# Altium PCB Main_pcb.PcbDoc
Units mil, origin at the board's own origin, x right, y up, seen from the top; angles counter-clockwise.
Board outline 2745 x 3735 mil, 2 copper layers (Top Layer, Bottom Layer); 45 components, 44 nets, 175 pads, 5 vias.
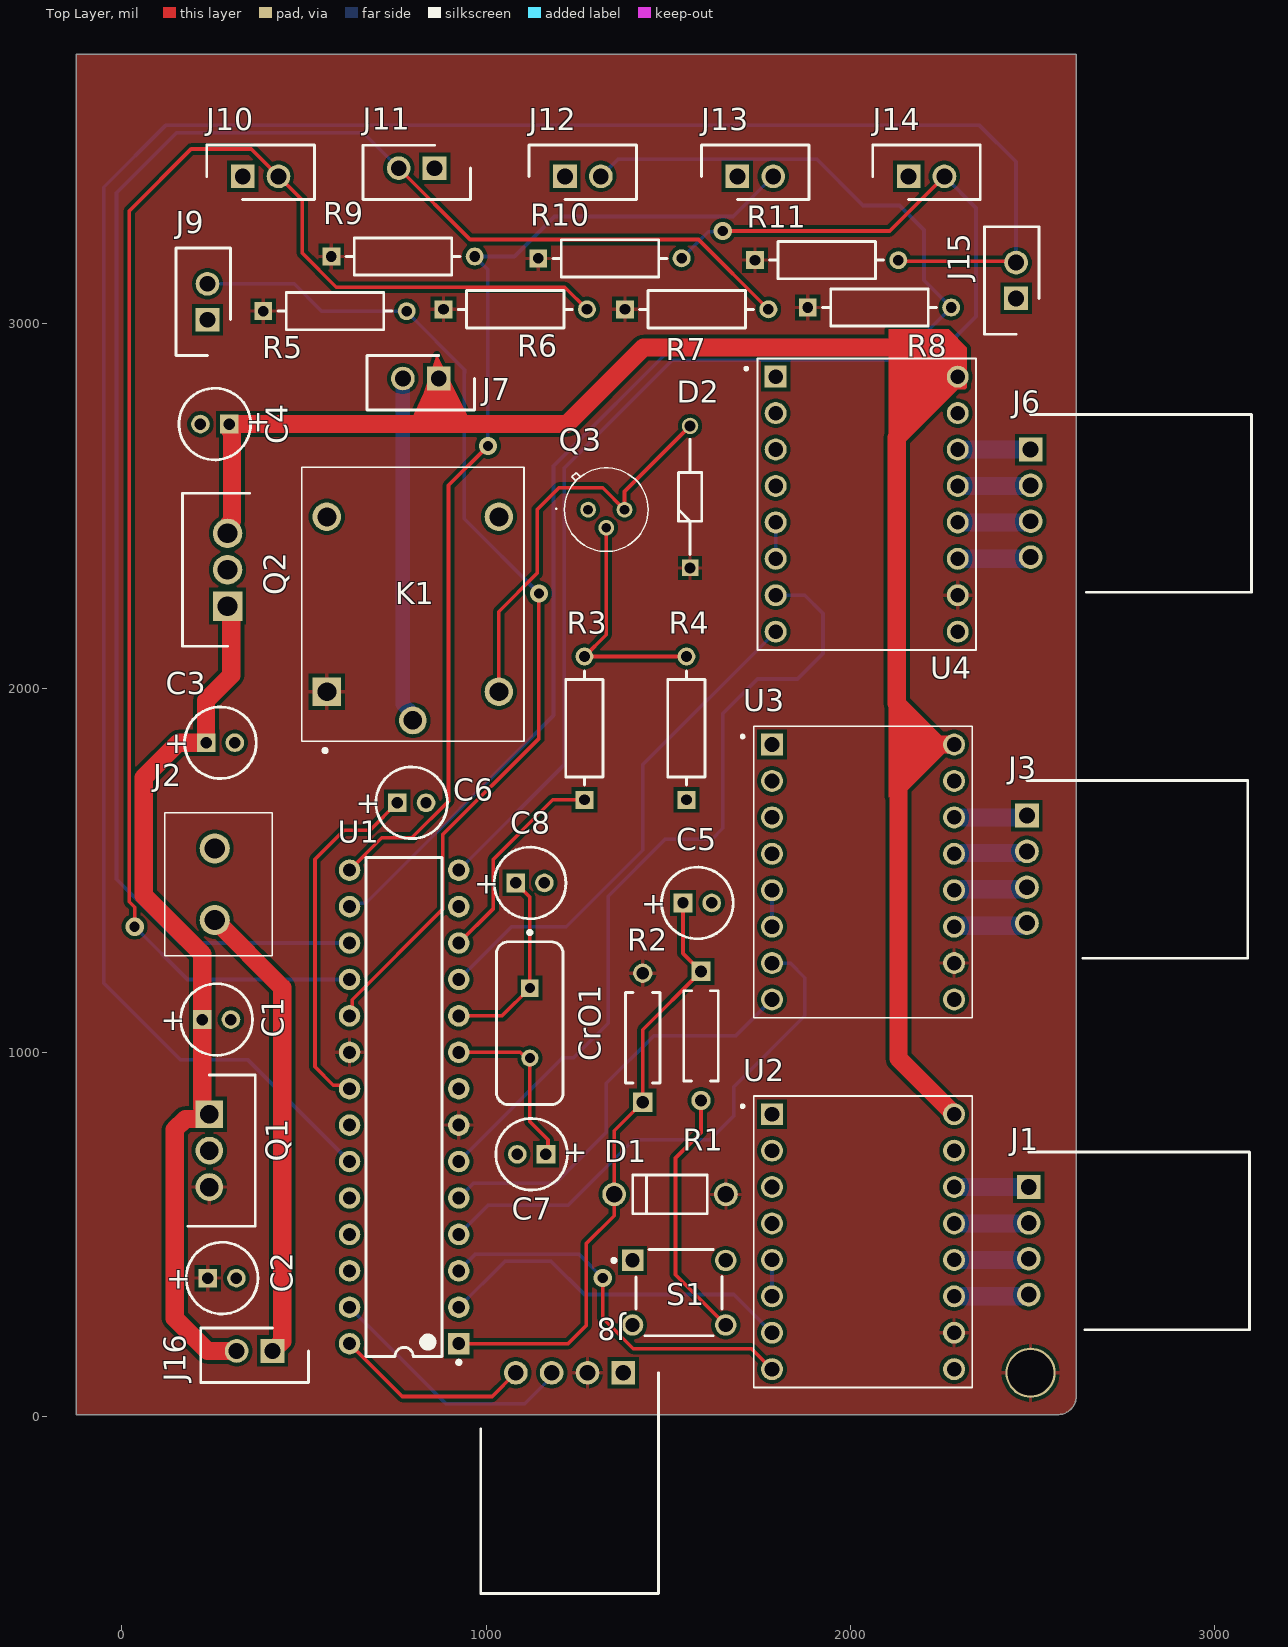
[diagram p0: Top Layer view]
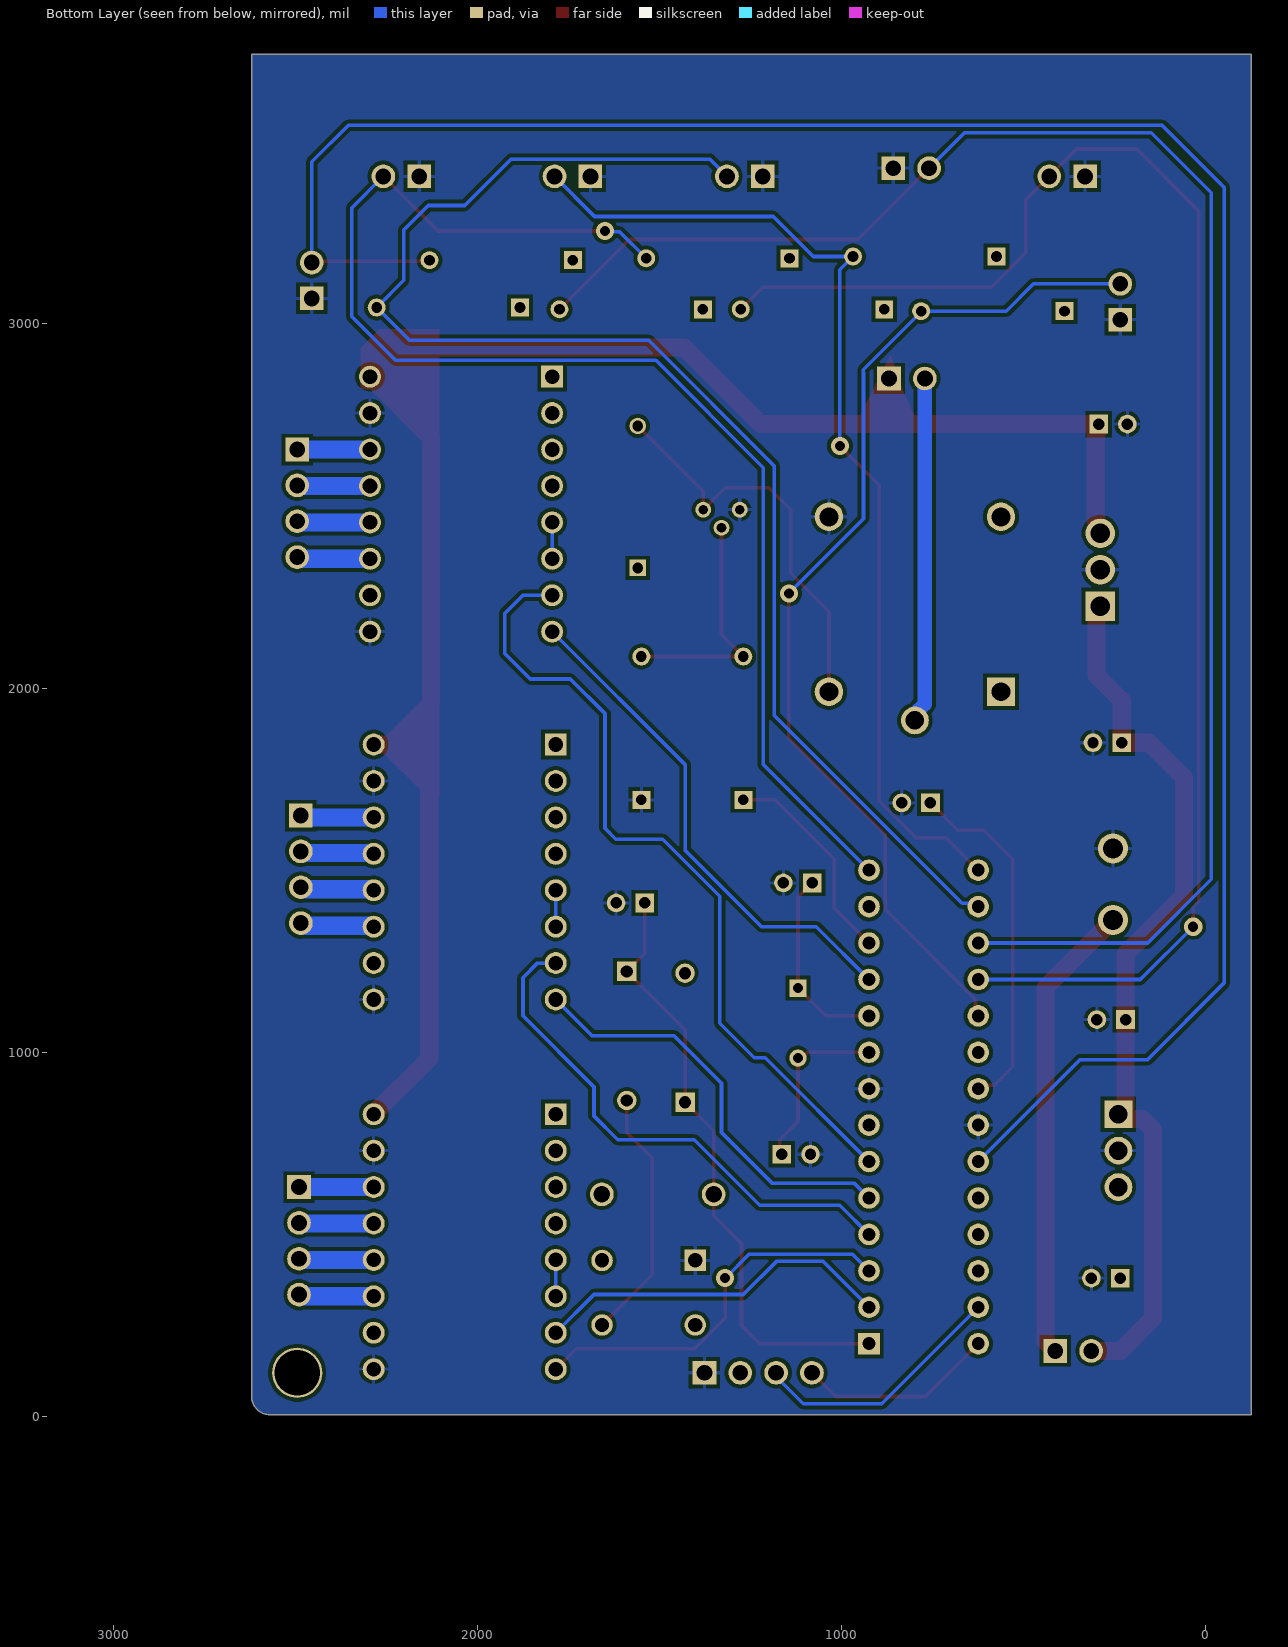
[diagram p1: Bottom Layer view, seen from below]
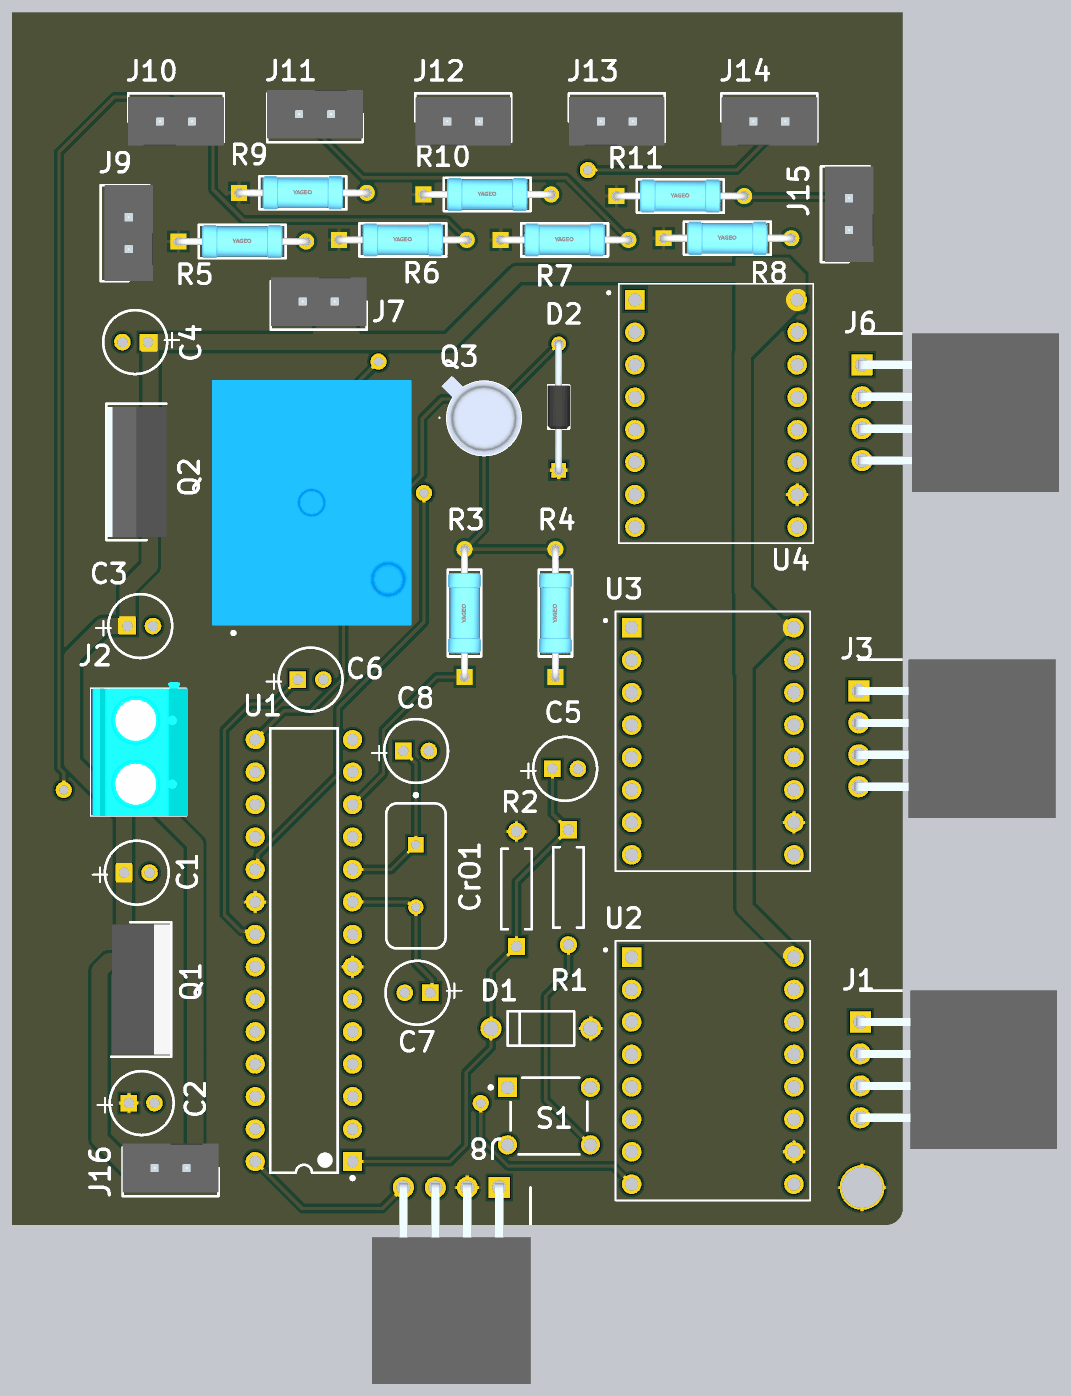
[diagram p2: 3D render of the assembled board from above, using the file's embedded part models]

## Layer stack, top to bottom
Top Solder: solder mask 0.4, Solder Resist, Dk 3.5
Top Layer: signal copper 1.4
Dielectric 1: dielectric 12.6, FR-4, Dk 4.8
Bottom Layer: signal copper 1.4
Bottom Solder: solder mask 0.4, Solder Resist, Dk 3.5

## Board outline
-125,5 -125,3740 2620,3740 2620,55 cw(c2570.01,54.99) 2570,5

## Design rules (kind name [scope] priority, off if disabled: settings)
Clearance [All] p1: gap=10 ignorepadtopadclearanceinfootprint=FALSE except(0: Arc-Hole Track-Hole SMDPad-Hole THPad-Hole Via-Hole Fill-Hole Poly-Hole Region-Hole Text-Hole)
PolygonConnect [All] p1: connectstyle=Relief reliefconductorwidth=10 reliefentries=4 polygonreliefangle="90 Angle" airgapwidth=10
RoutingVias [All] p1: holewidth=28 width=50 viastyle="Through Hole" minholewidth=28 minwidth=50 maxholewidth=28 maxwidth=50
SolderMaskExpansion [All] p1: expansion=4 istentingtop=FALSE
Width [All] p1: maxlimit=60 minlimit=10 preferedwidth=10 minimp=50.000000 maximp=50.000000 favimp=50.000000
30 further rules are at their usual default settings.

## Classes and differential pairs
component class U_Relay: D2 K1 Q3 R3 R4
component class U_microcontroller: C5 C6 C7 C8 CrO1 D1 J9 J10 J11 J12 J13 J14 J15 R1 R2 R5 R6 R7 R8 R9 R10 R11 S1 U1
component class U_A4988_motor_drivers: U2 U3 U4
component class U_Power_circuit: C1 C2 C3 C4 Q1 Q2
component class Main_Schematic: J1 J2 J3 J6 J7 J8 J16

## Components (designator, comment, footprint, x,y, rotation, side; value= is the part's Value field where it differs from the comment)
C1 "ECA1HM100" CAPPR55-200-1100X500X1200 260,1090 r0 top value=10µF
C2 "ECA1HM100" CAPPR55-200-1100X500X1200 275,380 r0 top value=1µF
C3 "ECA1HM100" CAPPR55-200-1100X500X1200 270.63,1850 r0 top value=100µF
C4 "ECA1HM100" CAPPR55-200-1100X500X1200 255,2725 r180 top value=0.1µF
C5 "ECA1HM100" CAPPR55-200-1100X500X1200 1580,1410 r0 top value=10µF
C6 "ECA1HM100" CAPPR55-200-1100X500X1200 795.63,1685 r0 top value=10µF
C7 "ECA1HM100" CAPPR55-200-1100X500X1200 1125,720 r180 top value=22pF
C8 "ECA1HM100" CAPPR55-200-1100X500X1200 1120.63,1465 r0 top value=22pF
CrO1 "FOXSLF/160-20" FOX-FOXSLF160-20 1120,1080 r270 top
D1 "1N4007" FAIR-DO-41-2 1505,610 r180 top
D2 "1N4148TR" DIOAD990W55L340D162 1560,2330 r90 top
J1 "Motor_1" SHDRRA4W64P0X250_1X4_1240X1150X700P 2490,630 r270 top
J2 "KF301-2P" KF3012P 255,1560 r270 top
J3 "Motor_2" SHDRRA4W64P0X250_1X4_1240X1150X700P 2485,1650 r270 top
J6 "Motor_3" SHDRRA4W64P0X250_1X4_1240X1150X700P 2495,2655 r270 top
J7 "coil" SHDR2W64P0X250_1X2_750X380X600P 870,2850 r180 top
J8 "Motor_3" SHDRRA4W64P0X250_1X4_1240X1150X700P 1376.85,120 r180 top
J9 "M1" SHDR2W64P0X250_1X2_750X380X600P 235,3011.57 r90 top
J10 "M2" SHDR2W64P0X250_1X2_750X380X600P 331.57,3405 r0 top
J11 "M3" SHDR2W64P0X250_1X2_750X380X600P 858.43,3427.64 r180 top
J12 "M4" SHDR2W64P0X250_1X2_750X380X600P 1216.57,3405 r0 top
J13 "M5" SHDR2W64P0X250_1X2_750X380X600P 1690,3405 r0 top
J14 "M6" SHDR2W64P0X250_1X2_750X380X600P 2160,3405 r0 top
J15 "M7" SHDR2W64P0X250_1X2_750X380X600P 2455,3070 r90 top
J16 "Input" SHDR2W64P0X250_1X2_750X380X600P 413.43,180 r180 top
K1 "SRD-05VDC-SL-C" RELAY_SRD-05VDC-SL-C 798.78,2230.16 r90 top
Q1 "LM7805CT" TO254P470X1028X1955-3P 240,830 r270 top
Q2 "LM7809CT" TO254P470X1016X2019-3P 290,2225.2 r90 top
Q3 "BC109C" CENTRAL_TO18 1330,2490 r0 top
R1 "MFR-25FBF52-221R" RESA60-630X240 1590,1045 r270 top value=221
R2 "MFR-25FBF52-10K" RESA60-630X240 1430,1040 r90 top value=10k
R3 "1k" FP-MFR-25-MFG#1 1270,1890 r90 top value=1.18kΩ
R4 "10k" FP-MFR-25-MFG#1 1550,1890 r90 top value=1.18kΩ
R5 "1k" FP-MFR-25-MFG#2 585,3035 r0 top value=1.18kΩ
R6 "1k" FP-MFR-25-MFG#2 1080,3040 r0 top value=1.18kΩ
R7 "1k" FP-MFR-25-MFG#2 1578.15,3040 r0 top value=1.18kΩ
R8 "1k" FP-MFR-25-MFG#2 2080,3045 r0 top value=1.18kΩ
R9 "1k" FP-MFR-25-MFG#2 771.85,3185 r0 top value=1.18kΩ
R10 "1k" FP-MFR-25-MFG#2 1340,3180 r0 top value=1.18kΩ
R11 "1k" FP-MFR-25-MFG#2 1935,3175 r0 top value=1.18kΩ
S1 "B3F-1000" OMRON-B3F-1000-4_V 1530,340 r0 top
U1 "ATMEGA328P-PU" ATML-28P3 775,850 r180 top
U2 "A4988_STEPPER_MOTOR_DRIVER_CARRIER" MODULE_A4988_STEPPER_MOTOR_DRIVER_CARRIER 2035,480 r0 top
U3 "A4988_STEPPER_MOTOR_DRIVER_CARRIER" MODULE_A4988_STEPPER_MOTOR_DRIVER_CARRIER 2035,1495 r0 top
U4 "A4988_STEPPER_MOTOR_DRIVER_CARRIER" MODULE_A4988_STEPPER_MOTOR_DRIVER_CARRIER 2045,2505 r0 top

## Footprints (in the part's own frame and the unit in brackets; to place one, negate y for a bottom-side part, rotate by r counter-clockwise, add the part's x,y. Pads: shape width x height; smd on the part's side, far side on the other; paste and mask are expansions set on the pad)
ATML-28P3 [mm] "DIP, 28-Leads, Body 34.8x7.2mm, Pitch 2.54mm"
  rect 1.5x1.5 hole 0.9: 1(-3.81,16.51)
  round 1.5 hole 0.9: 2(-3.81,13.97) 3(-3.81,11.43) 4(-3.81,8.89) 5(-3.81,6.35) 6(-3.81,3.81) 7(-3.81,1.27) 8(-3.81,-1.27) 9(-3.81,-3.81) 10(-3.81,-6.35) 11(-3.81,-8.89) 12(-3.81,-11.43) 13(-3.81,-13.97) 14(-3.81,-16.51) 15(3.81,-16.51) 16(3.81,-13.97) 17(3.81,-11.43) 18(3.81,-8.89) 19(3.81,-6.35) 20(3.81,-3.81) 21(3.81,-1.27) 22(3.81,1.27) 23(3.81,3.81) 24(3.81,6.35) 25(3.81,8.89) 26(3.81,11.43) 27(3.81,13.97) 28(3.81,16.51)
  silkscreen extent -3.94,-17.4 2.65,17.93, body extent -3.95,-17.4 3.95,17.4, height 4.58
CAPPR55-200-1100X500X1200 [mm] "THD, 2-Leads, Dia 5mm, Pin Spacing 2mm"
  rect 1.3x1.3 hole 0.8: 1(-1,0)
  round 1.3 hole 0.8: 2(1,0)
  silkscreen extent -2.5,-2.5 2.5,2.5, body extent -2.5,-2.5 2.45,2.5, height 12
CENTRAL_TO18 [mm]
  round 1.1 hole 0.68: 1(-1.27,0) 2(0,-1.27) 3(1.27,0)
  silkscreen extent -3.53,-2.92 2.92,2.92, body extent -3.34,-2.92 2.91,3.34, height 5.63
DIOAD990W55L340D162 [mm]
  rect 1.15x1.15 hole 0.75: 1(0,0)
  round 1.15 hole 0.75: 2(9.9,0)
  silkscreen extent 0.93,-0.81 8.97,0.81, body extent -0.28,-0.87 10.18,0.87, height 1.75
FAIR-DO-41-2 [mm] "THD, 2-Leads, Body 5.2x2.72mm, Pin Spacing 7.8mm"
  round 1.65 hole 1.15: 1(-3.9,0) 2(3.9,0)
  silkscreen extent -2.6,-1.35 2.6,1.35, body extent -4.29,-1.17 4.29,1.17, height 2.35
FOX-FOXSLF160-20 [mm] "THD, 2-Leads, Body 11.35x4.65mm"
  rect 1.2x1.2 hole 0.7: 1(-2.44,0)
  round 1.2 hole 0.7: 2(2.44,0)
  silkscreen extent -6.45,-2.32 5.68,2.32, body extent -5.67,-2.32 5.68,2.33, height 3.6
FP-MFR-25-MFG#1 [mm]
  rect 1.25x1.25 hole 0.75 paste-2539.97 mask+0: 1(-5,0)
  round 1.25 hole 0.75 paste-2539.97 mask+0: 2(5,0)
  silkscreen extent -3.97,-1.3 3.97,1.3, body extent -5.72,-1.4 5.72,1.4, height 0.25
FP-MFR-25-MFG#2 [mm]
  rect 1.25x1.25 hole 0.75 paste-1000 mask+0: 1(-5,0)
  round 1.25 hole 0.75 paste-1000 mask+0: 2(5,0)
  silkscreen extent -3.98,-1.3 3.98,1.3, body extent -5.72,-1.4 5.72,1.4, height 0.25
KF3012P [mm]
  round 2.1 hole 1.4: 1(0,0) 2(5,0)
  silkscreen extent -2.5,-3.5 7.5,4, body extent -2.99,-3.35 7.51,4.15, height 10
MODULE_A4988_STEPPER_MOTOR_DRIVER_CARRIER [mm]
  rect 1.53x1.53 hole 1.02: 1(-6.35,8.89)
  round 1.53 hole 1.02: 2(-6.35,6.35) 3(-6.35,3.81) 4(-6.35,1.27) 5(-6.35,-1.27) 6(-6.35,-3.81) 7(-6.35,-6.35) 8(-6.35,-8.89) 9(6.35,-8.89) 10(6.35,-6.35) 11(6.35,-3.81) 12(6.35,-1.27) 13(6.35,1.27) 14(6.35,3.81) 15(6.35,6.35) 16(6.35,8.89)
  silkscreen extent -8.5,-10.16 7.62,10.16
OMRON-B3F-1000-4_V [mm] "TH, 4-Leads, Body 6x6mm"
  rect 1.5x1.5 hole 1 paste-2539.97: 1(-3.25,2.25)
  round 1.5 hole 1 paste-2539.97: 2(3.25,2.25) 4(3.25,-2.25)
  round 1.5 hole 1 paste-2539.97 mask+0.102: 3(-3.25,-2.25)
  silkscreen extent -4.67,-3 3,3, body extent -3.4,-3 3.4,3, height 4.5
RELAY_SRD-05VDC-SL-C [mm]
  rect 1.98x1.98 / inner round 1.98 / far side rect 1.98x1.98 hole 1.32: A1(-6.1,6)
  round 1.98 hole 1.32: A2(-6.1,-6) NC(6.1,6) NO(6.1,-6)
  round 1.935 hole 1.29: COM(-8.1,0)
  silkscreen extent -10.3,-7.75 9.55,7.75, body extent -9.6,-7.8 9.6,7.8, height 15.8
RESA60-630X240 [mm] "Axial Resistor, 2-Leads, Dia 2.4mm, Body Length 6.3mm"
  rect 1.35x1.35 hole 0.85: 1(-4.5,0)
  round 1.35 hole 0.85: 2(4.5,0)
  silkscreen extent -3.15,-1.2 3.15,1.2, body extent -4.77,-1.19 4.77,1.2, height 2.4
SHDR2W64P0X250_1X2_750X380X600P [mm]
  rect 1.65x1.65 hole 1.1: 1(0,0)
  round 1.65 hole 1.1: 2(2.5,0)
  silkscreen extent -2.5,-1.6 5,2.2, body extent -2.5,-1.9 5,1.9, height 6
SHDRRA4W64P0X250_1X4_1240X1150X700P [mm]
  rect 1.65x1.65 hole 1.1: 1(0,0)
  round 1.65 hole 1.1: 2(2.5,0) 3(5,0) 4(7.5,0)
  silkscreen extent -2.45,0 9.95,15.4, body extent -2.45,-0.32 9.95,15.4, height 7
TO254P470X1016X2019-3P [mm]
  rect 2.055x2.055 hole 1.37: 1(0,0)
  round 2.055 hole 1.37: 2(2.535,0) 3(5.07,0)
  silkscreen extent -2.8,-1.55 7.87,3.15, body extent -2.55,-1.55 7.61,3.15, height 18.54
TO254P470X1028X1955-3P [mm]
  rect 1.935x1.935 hole 1.29: 1(0,0)
  round 1.935 hole 1.29: 2(2.54,0) 3(5.08,0)
  silkscreen extent -2.73,-1.5 7.81,3.2, body extent -2.54,-1.43 7.62,3.14, height 19.38

## Part data
C1 C2 C3 C4 C5 C6 C7 C8: library part CMP-001-00025-7, "Aluminum Electrolytic Capacitor, 10 uF, +/- 20%, 50 V, -40 to 85 degC, 2-Pin THD, RoHS, Bulk", Capacitor Type=Electrolytic, Case/Package=Radial, Manufacturer=Panasonic, Max Operating Temperature=85°C, Min Operating Temperature=-40°C, Package Description="2-Pin Radial Lead, Dia 5 mm, Height 12 mm", Package Quantity=200, Package Reference=CAPPR55-200-1100X500X1200, Ripple Current=65mA, Tolerance=20%, Voltage Rating=50V, Datasheet URL=https://industrial.panasonic.com/cdbs/www-data/pdf/RDF0000/ABA0000C1218.pdf, Datasheet Version="Rev. 05, 10/2016", Diameter=5mm, Lead Pitch=2mm, Manufacturer URL=http://www.panasonic.com/, Mounting Technology=TH, Packaging=Bulk, Pins=2, Ripple Current (AC)=65mA, RoHS Compliant=True
CrO1: library part CMP-1749-00003-1, "Resistance Weld Thru-Hole Crystal, 16 MHz, -20 to 70 degC, 2-Pin THD, RoHS, Bulk", Case\Package=Axial, Max Operating Temperature="155 degC", Min Operating Temperature="-55 degC", Package Quantity=200, Power Rating="250 mW", Resistance="221 kohm", Tolerance=1%, Voltage Rating="250 V", ComponentLink1Description="Manufacturer URL", ComponentLink1URL=http://www.foxonline.com/, ComponentLink2Description=Datasheet, ComponentLink2URL=http://www.foxonline.com/pdfs/hc49slf.pdf, DatasheetVersion=Mar-15, Length="0.248 inch", Mount="Through Hole", PackageDescription="2-Pin Through Hole Device, Body 11.35 x 4.65 mm", PackageReference=FOXSLF160-20, Packaging=Bulk, RoHSCompliant=true
D1: library part CMP-004-00007-2, "General Purpose Rectifier, 1.1 V, 1.0 A, -55 to 175 degC, 2-Pin DO-41, RoHS, Tape and Reel", Case/Package=DO-41-2, Forward Current=1A, Forward Voltage=1.1V, Manufacturer=Fairchild, Max Operating Temperature=175°C, Max Surge Current=30A, Min Operating Temperature=-55°C, Package Description="2-Pin Axial Lead, Dia 2.375 mm, Body Length 4.63 mm", Package Quantity=5000, Package Version="Rev. 2, 09/2008", Peak Reverse Current=5uA, Datasheet URL=https://www.fairchildsemi.com/datasheets/1N/1N4007.pdf, Datasheet Version="Rev. 1.1.0, 11/2014", Elements=1, Manufacturer URL=https://www.fairchildsemi.com/, Mounting Technology=TH, Package Reference=DO-41-2, Package URL=http://www.fairchildsemi.com/dwg/DO/DO41A.pdf, Packaging=TapeandReel, Pins=2, RoHS Compliant=True
D2: "Diode", Manufacturer_Name=Vishay, Mouser Part Number=78-1N4148, Arrow Part Number=1N4148TR, Arrow Price/Stock=https://www.arrow.com/en/products/1n4148tr/vishay?region=nac, Datasheet Link=https://www.vishay.com/docs/81857/1n4148.pdf, Manufacturer_Part_Number=1N4148TR, Mouser Price/Stock=https://www.mouser.co.uk/ProductDetail/Vishay-Semiconductors/1N4148TR?qs=HfDODkYFUverVKi%2FJ%2Fe5IA%3D%3D
J1 J3 J6 J8: library part S4B-XH-A_LF__SN_, "Connector", Arrow Part Number=S4B-XH-A(LF)(SN), Manufacturer_Name="JST (JAPAN SOLDERLESS TERMINALS)", Arrow Price/Stock=https://www.arrow.com/en/products/s4b-xh-a-lf-sn/jst-manufacturing?region=europe, Datasheet Link=http://www.jst-mfg.com/product/pdf/eng/eXH.pdf, Height=7mm, Manufacturer_Part_Number=S4B-XH-A(LF)(SN)
J2: "Connector", Manufacturer_Name="Handson Technology", Datasheet Link=http://www.handsontec.com/dataspecs/terminal%20block-5mm.pdf, Height=10mm, Manufacturer_Part_Number=KF301-2P
J7 J9 J10 J11 J12 J13 J14 J15 J16: library part B2B-EH-A, "Connector", Manufacturer_Name="JST (JAPAN SOLDERLESS TERMINALS)", Datasheet Link=http://www.jst-mfg.com/product/pdf/eng/eEH.pdf, Height=6mm, Manufacturer_Part_Number=B2B-EH-A
K1: "5V Trigger Relay Module For Arduino And Raspberry Pi 5V Trigger Relay Module For Arduino And Raspberry Pi", Package="NON STANDARD-5 Songle Relay", Availability="Not in stock", Check_prices=https://www.snapeda.com/parts/SRD-05VDC-SL-C/Songle+Relay/view-part/?ref=eda, MF="Songle Relay", MP=SRD-05VDC-SL-C, Price=None, SnapEDA_Link=https://www.snapeda.com/parts/SRD-05VDC-SL-C/Songle+Relay/view-part/?ref=snap
Q1: "Integrated Circuit", Manufacturer_Name="Texas Instruments", Mouser Part Number=926-LM7805CT, Arrow Part Number=LM7805CT, Arrow Price/Stock=https://www.arrow.com/en/products/lm7805ct/texas-instruments?region=europe, Datasheet Link=http://www.ti.com/lit/ds/symlink/lm340.pdf, Height=4.7mm, Manufacturer_Part_Number=LM7805CT, Mouser Price/Stock=https://www.mouser.co.uk/ProductDetail/Texas-Instruments/LM7805CT?qs=QbsRYf82W3EaqXeMDVwIfQ%3D%3D
Q2: "Power Supply", Manufacturer_Name=onsemi, Mouser Part Number=512-LM7809CT, Arrow Part Number=LM7809CT, Arrow Price/Stock=https://www.arrow.com/en/products/lm7809ct/on-semiconductor?region=europe, Datasheet Link=https://mouser.componentsearchengine.com/Datasheets/2/LM7809CT.pdf, Height=4.7mm, Manufacturer_Part_Number=LM7809CT, Mouser Price/Stock=https://www.mouser.co.uk/ProductDetail/ON-Semiconductor-Fairchild/LM7809CT?qs=VOMQJJE%252BBNmmTueoZonUjQ%3D%3D
Q3: "Transistor BJT NPN", Manufacturer_Name="Central Semiconductor", Mouser Part Number=610-BC109C, Datasheet Link=https://my.centralsemi.com/get_document.php?cmp=1&mergetype=pd&mergepath=pd&pdf_id=BC107.PDF, Manufacturer_Part_Number=BC109C, Mouser Price/Stock=https://www.mouser.com/Search/Refine.aspx?Keyword=610-BC109C
R1: library part CMP-009-00051-4, "Axial Resistor, 221 Ohm, +/- 1%, 250 mW, -55 to 155 degC, 2-Pin THD, RoHS, Bulk", Case/Package=Axial, Manufacturer=Yageo, Max Operating Temperature=155°C, Min Operating Temperature=-55°C, Package Description="2-Pin Axial Lead, Dia 2.4 mm, Body Length 6.3 mm", Package Quantity=200, Package Reference=MFR-25, Power=250mW, Tolerance=1%, Voltage Rating=250V, Datasheet URL=http://www.yageo.com/documents/recent/Yageo%20LR_MFR_2013.pdf, Datasheet Version=Apr-13, Manufacturer URL=http://www.yageo.com/, Mounting Technology=TH, Packaging=Bulk, RoHS Compliant=True
R2: library part CMP-009-00047-4, "Axial Resistor, 10 KOhm, +/- 1%, 0.25 W, -55 to 155 degC, 2-Pin THD, RoHS, Bulk", Case/Package=Axial, Manufacturer=Yageo, Max Operating Temperature=155°C, Min Operating Temperature=-55°C, Package Description="2-Pin Axial Lead, Dia 2.4 mm, Body Length 6.3 mm", Package Quantity=200, Package Reference=MFR-25, Power=250mW, Tolerance=1%, Voltage Rating=250V, Datasheet URL=http://www.yageo.com/documents/recent/Yageo%20LR_MFR_2013.pdf, Datasheet Version=Apr-13, Manufacturer URL=http://www.yageo.com/, Mounting Technology=TH, Packaging=Bulk, RoHS Compliant=True
R3 R4 R5 R6 R7 R8 R9 R10 R11: library part CMP-03413-000001-1, "RES 1.18K OHM 1/4W 1% AXIAL", Manufacturer=Yageo, Manufacturer Part Number=MFR-25FBF52-1K18, Package=MFR-25, Power Rating=0.25W, Resistance=1.18kΩ, Temperature="-55°C to +155°C", Temperature Coefficient=100ppm/°C, Temperature Range High=+155°C, Temperature Range Low=-55°C, Tolerance=1%, Voltage Rating=250V, Automotive=No, Category=Res, ComponentLink2Description=Datasheet, ComponentLink2URL=https://www.yageo.com/upload/media/product/products/datasheet/lr/Yageo_LR_MFR_1.pdf, Composition="Metal Film", Device Class L1="Passive Components", Device Class L2=Resistors, Device Class L3="Through-Hole Resistors", Digikey Description="RES 1.18K OHM 1/4W 1% AXIAL", Height=2.6mm, Ipc Land Pattern Name=RESAD1000W75L680D260, Lead Free=Yes, Mouser Description="Metal Film Resistors 1.18K OHM 1/4W 1%", Octopart=https://octopart.com/mfr-25fbf52-1k18-yageo-56251681, RoHS=TRUE, Series=MFR
S1: library part CMP-011-00004-2, "Tactile Switch, SPST-NO, 0.05 A, 24 V, -25 to 70 degC, 4-Pin THD, RoHS, Bulk", Contact Current Rating=50mA, Manufacturer="Omron Electronic Components", Max Contact Resistance=100mohm, Max Operating Temperature=70°C, Max Voltage Rating (DC)=24V, Min Operating Temperature=-25°C, Operating Force=100gf, Package Description="4-Pin Through Hole Device, Body 6 x 6 mm", Package Quantity=1500, Resistance=0.1Ohm, Case/Package=B3F-1000, Contact Material=Gold, Contact Plating=Gold, Current Rating=50mA, Datasheet URL=http://www.omron.com/ecb/products/pdf/en-b3f.pdf, Datasheet Version=Jan-15, Manufacturer URL=http://www.omron.com/, Max Current Rating=50mA, Mounting Technology=TH, Package Reference=B3F-1000, Packaging=Bulk, Pins=4, RoHS Compliant=True, Throw Configuration=SPST, Voltage Rating=24V, Voltage Rating (DC)=24V
U1: library part CMP-020-00004-3, "8-Bit Microcontroller with 32 KBytes In-System Programmable Flash, 23 I/Os, -40 to 85 degC, 28-Pin PDIP (28P3), RoHS, Tube", Case/Package=DIP, Manufacturer=Atmel, Max Clock Frequency=20MHz, Max Operating Temperature=85°C, Max Supply Voltage=5.5V, Min Operating Temperature=-40°C, Min Supply Voltage=1.8V, Package Description="28-Pin Plastic Dual Inline Package, Body 34.671 x 7.3025 mm, Pitch 2.54 mm", Package Quantity=14, Package Reference=28P3, Package Version="Rev. B, 09/2001", Datasheet URL=http://www.atmel.com/images/Atmel-8271-8-bit-AVR-Microcontroller-ATmega48A-48PA-88A-88PA-168A-168PA-328-328P_datasheet_Complete.pdf, Datasheet Version="Rev. 8271J, 11/2015", Density=32KB, Ethernet Channels=0, I/Os=23, Interface=USART, Manufacturer URL=http://www.atmel.com/, Mounting Technology=TH, Package URL=http://www.atmel.com/images/Atmel-8271-8-bit-AVR-Microcontroller-ATmega48A-48PA-88A-88PA-168A-168PA-328-328P_datasheet_Complete.pdf, Packaging=Rail/Tube, Pins=28, RAM Size=2KB, RoHS Compliant=True
U2 U3 U4: "Stepper motor controler; IC: A4988; 1A; Uin mot: 8Ã·35V", Package=None, Availability=Unavailable, MP=A4988_STEPPER_MOTOR_DRIVER_CARRIER, Price=None

## Free pads (board coordinates)
  round 137.8 hole 125.98: 7(2495,120)

## Via types
v1: diameter 50, hole 28, Top Layer to Bottom Layer, 5 vias

## Nets (pads, with @x,y where several pads share a name; then routed paths per layer and width w, separated by ;. In a path a pad name is that pad's centre, name@x,y a point inside that pad or via, vN(x,y) a via of type N, cw(c..) or ccw(c..) an arc to the next point about the centre after c; other vN are vias at no path point)
5V: C2.1 D1.1 D2.1 J8.2 K1.A1 pad.7 Q1.3 R2.2 R5.1 R6.1 R7.1 R8.1 R9.1 R10.1 R11.1 U1.7 U1.20 U2.10 U3.10 U4.10
9V: C4.1 J7.1 Q2.3 U2.16 U3.16 U4.16 | length 4738.3
  Top Layer w50: Q2.3 295.91,2430.72 295.91,2452.57 302.33,2458.99 302.33,2703.11 294.37,2711.07 C4.1 1222.33,2725 1432.33,2935 2263.75,2935 2293.04,2905.71 U4.16@2293.04,2868.04 ; 2245.37,1843.04 2132.33,1730 2132.33,982.67 U2.16 ; U3.16 2240,1845 2127.33,1957.67 2127.33,2687.33 U4.16
GND: C1.2 C2.2 C3.2 C4.2 C5.2 C6.2 C7.2 C8.2 J2.1 J8.1 J9.1 J10.1 J11.1 J12.1 J13.1 J14.1 J15.1 K1.NO Q1.2 Q2.2 Q3.1 R4.1 S1.1 U1.8 U1.22 U2.9 U2.15 U3.9 U3.15 U4.9 U4.15
NetC1_1: C1.1 C3.1 J16.2 Q1.1 Q2.1 | length 2454.9
  Top Layer w50: Q2.1 300,2215.2 300,2035 231.26,1966.26 C3.1 155.86,1850 60,1754.14 60,1430 220.63,1269.37 C1.1 220.63,849.37 Q1.1 226.91,816.91 174.29,816.91 145,787.62 145,270 235,180 J16.2
NetC6_1: C6.1 U1.21 | length 980.3
  Top Layer w10: U1.21 615.61,909.39 580.61,909.39 530,960 530,1530 610,1610 681.26,1610 C6.1
NetC7_1: C7.1 CrO1.2 U1.9 | length 488.6
  Top Layer w10: U1.9 1093.86,1000 1109.92,983.94 CrO1.2 1120,810 1170,760 1170,725.63 C7.1
NetC8_1: C8.1 CrO1.1 U1.10 | length 531.5
  Top Layer w10: U1.10 1043.94,1100 CrO1.1 1120,1426.26 C8.1
NetD2_2: D2.2 K1.A2 Q3.3 | length 1137.5
  Top Layer w10: K1.A2 1035,2210 1140,2315 1140,2490 1200,2550 1320,2550 Q3.3 1380,2539.76 D2.2
NetJ1_1: J1.1 U2.14 | length 205
  Bottom Layer w50: U2.14 J1.1
NetJ1_2: J1.2 U2.13 | length 205
  Bottom Layer w50: U2.13 J1.2@2490,530
NetJ1_3: J1.3 U2.12 | length 205
  Bottom Layer w50: U2.12 J1.3@2490,430
NetJ1_4: J1.4 U2.11 | length 205
  Bottom Layer w50: U2.11 J1.4@2490,330
NetJ2_2: J2.2 J16.1 | length 1270.8
  Top Layer w50: J2.2 440,1178.15 440,206.57 J16.1
NetJ3_1: J3.1 U3.14 | length 202.1
  Bottom Layer w10: J3.1@2480,1645 J3.1
  Bottom Layer w50: U3.14 J3.1@2480,1645
NetJ3_2: J3.2 U3.13 | length 202.1
  Bottom Layer w10: U3.13 U3.13@2287.5,1547.5 ; J3.2@2482.5,1547.5 J3.2@2485,1550
  Bottom Layer w50: U3.13@2287.5,1547.5 J3.2@2482.5,1547.5
NetJ3_3: J3.3 U3.12 | length 202.1
  Bottom Layer w10: U3.12 U3.12@2287.5,1447.5 ; J3.3@2482.5,1447.5 J3.3@2485,1450
  Bottom Layer w50: U3.12@2287.5,1447.5 J3.3@2482.5,1447.5
NetJ3_4: J3.4 U3.11 | length 202.1
  Bottom Layer w10: U3.11 U3.11@2287.5,1347.5 ; J3.4@2482.5,1347.5 J3.4@2485,1350
  Bottom Layer w50: U3.11@2287.5,1347.5 J3.4@2482.5,1347.5
NetJ6_1: J6.1 U4.14 | length 200
  Bottom Layer w50: U4.14 J6.1
NetJ6_2: J6.2 U4.13 | length 200
  Bottom Layer w50: U4.13 J6.2@2495,2555
NetJ6_3: J6.3 U4.12 | length 200
  Bottom Layer w50: U4.12 J6.3@2495,2455
NetJ6_4: J6.4 U4.11 | length 200
  Bottom Layer w50: U4.11 J6.4@2495,2355
NetJ7_2: J7.2 K1.COM | length 950
  Bottom Layer w40: J7.2 771.57,1956.37 798.78,1929.17 K1.COM
NetJ8_3: J8.3 U1.27 | length 706.3
  Bottom Layer w10: U1.27 890,35 1105.77,35 1180,109.23 J8.3
NetJ8_4: J8.4 U1.28 | length 543.6
  Top Layer w10: U1.28 770,55 1016.57,55 J8.4
NetJ9_2: J9.2 R5.2 U1.19 | length 2879.4
  Top Layer w10: U1.19 632.5,1107.5 632.5,1144.53 880.47,1392.5 880.47,1597.11 1145,1861.64 v1(1145,2260)
  Bottom Layer w10: J9.2 473.06,3110 548.06,3035 R5.2 781.85,3033.15 940.86,2874.14 940.86,2865.86 940,2865 940,2465 v1(1145,2260)
NetJ10_2: J10.2 R6.2 U1.18 | length 4216
  Top Layer w10: v1(35,1345) 35,1398.43 20,1413.43 20,3310 190,3480 355,3480 J10.2 495,3340 495,3194.57 588.73,3100.84 1216.01,3100.84 R6.2
  Bottom Layer w10: v1(35,1345) 180,1200 U1.18
NetJ11_2: J11.2 R7.2 U1.17 | length 4656.7
  Top Layer w10: J11.2 955.98,3231.66 1583.34,3231.66 R7.2
  Bottom Layer w10: U1.17 160,1300 -15,1475 -15,3360 150,3525 662.64,3525 J11.2
NetJ12_2: J12.2 R8.2 U1.16 | length 3965.7
  Bottom Layer w10: U1.16 634.39,1409.39 669.39,1409.39 1185,1925 1185,2610 1530,2955 2186.85,2955 R8.2 2202.17,3119.68 2202.17,3257.83 2135,3325 2035,3325 1907.52,3452.48 1362.48,3452.48 J12.2
NetJ13_2: J13.2 R9.2 U1.15 | length 2816.6
  Top Layer w10: U1.15 713.79,1588.79 796.19,1588.79 896.77,1689.36 896.77,2556.77 v1(1005,2665)
  Bottom Layer w10: v1(1005,2665) 1005,3148.7 R9.2 1077.72,3185 1187.72,3295 1678.43,3295 J13.2
NetJ14_2: J14.2 R10.2 U1.14 | length 3762.7
  Top Layer w10: v1(1650,3255) 2108.43,3255 J14.2
  Bottom Layer w10: U1.14 1215,1790 1215,2605 1510.12,2900.12 2225.12,2900.12 2345,3020 2345,3318.43 J14.2 ; R10.2 1610,3253.15 1648.15,3253.15 v1(1650,3255)
NetJ15_2: J15.2 R11.2 U1.23 | length 6282.3
  Top Layer w10: R11.2 2135.14,3171.71 2451.71,3171.71 J15.2
  Bottom Layer w10: U1.23 345,980 160,980 -50,1190 -50,3375 120,3545 2355,3545 2455,3445 J15.2
NetQ3_2: Q3.2 R3.2 R4.2 | length 658
  Top Layer w10: Q3.2 1330,2146.85 R3.2 R4.2
NetR1_2: R1.2 S1.4 | length 702.6
  Top Layer w10: R1.2 1590,780 1520,710 1520,389.37 S1.4
NetR3_1: R3.1 U1.12 | length 586.9
  Top Layer w10: U1.12 1020,1395 1020,1530 1183.15,1693.15 R3.1
NetU1_2: U1.2 U2.7 | length 993.3
  Bottom Layer w10: U1.2 1050.91,425.91 1179.09,425.91 1270,335 1680,335 U2.7
NetU1_3: U1.3 U2.8 | length 1074
  Top Layer w10: v1(1320,380) 1320,270.49 1404.2,186.29 1728.71,186.29 U2.8
  Bottom Layer w10: U1.3 970.91,445.91 1254.09,445.91 v1(1320,380)
NetU1_4: U1.4 U3.7 | length 1457
  Bottom Layer w10: U1.4 1005,580 1225,580 1405,760 1615,760 1680,825 1680,905 1875,1100 1875,1205 1835,1245 U3.7
NetU1_5: U1.5 U3.8 | length 1164.8
  Bottom Layer w10: U1.5 965,640 1190,640 1330,780 1330,915 1460,1045 1685,1045 U3.8
NetU1_6: U1.6 U4.7 | length 2242.4
  Top Layer w10: U1.6 U1.6@940,700
  Bottom Layer w10: U1.6 1210,985 1240,985 1335,1080 1335,1428.83 1491.17,1585 1620,1585 1650,1615 1650,1930 1745,2025 1855,2025 1925,2095 1925,2205 1875,2255 U4.7
NetU1_11: U1.11 U4.8 | length 1403.2
  Bottom Layer w10: U1.11 1070,1345 1220,1345 1430,1555 1430,1790 U4.8
NetU2_5: U2.5 U2.6 | length 100
  Bottom Layer w10: U2.6 U2.5
NetU3_5: U3.5 U3.6 | length 100
  Bottom Layer w10: U3.6 U3.5
NetU4_5: U4.5 U4.6 | length 100
  Bottom Layer w10: U4.6 U4.5
Reset: C5.1 D1.2 R1.1 R2.1 U1.1 | length 1681.6
  Top Layer w10: U1.1 1225,200 1275,250 1275,475 1351.46,551.46 D1.2 1351.46,784.29 R2.1 1430,1062.17 R1.1 1540.63,1271.54 C5.1
pads on no net: K1.NC S1.2 S1.3 U1.13 U1.24 U1.25 U1.26 U2.1 U2.2 U2.3 U2.4 U3.1 U3.2 U3.3 U3.4 U4.1 U4.2 U4.3 U4.4

## Polygon pours and split planes (outlines as drawn)
5V on Top Layer "5V_L01_P004" (solid, pour order 4): -125,5 -125,3740 2620,3740 2620,55 cw(c2570.01,54.99) 2570,5
GND on Bottom Layer "GND_L02_P005" (solid, pour order 5): -125,5 -125,3740 2620,3740 2620,55 cw(c2570.01,54.99) 2570,5

## Other copper
Top Layer:
  region net 9V: 865,2915 829.23,2810 794.23,2735 955.77,2735
  region net 9V: 2250,1860 2240,1860 2105,1995 2105,1699.81
  region net 9V: 2270,2985 2105,2985 2105,2685 2150,2685 2150,2740 2230,2820 2315,2820 2320,2825 2320,2935

## Text inside footprints (layer, text, board x,y; h text height)
C1: Top Overlay "+" at 106.14,1060.98 h59.06
C2: Top Overlay "+" at 121.14,350.98 h59.06
C3: Top Overlay "+" at 116.77,1820.98 h59.06
C4: Top Overlay "+" at 408.86,2754.02 h59.06 r180
C5: Top Overlay "+" at 1426.14,1380.98 h59.06
C6: Top Overlay "+" at 641.77,1655.98 h59.06
C7: Top Overlay "+" at 1278.86,749.02 h59.06 r180
C8: Top Overlay "+" at 966.77,1435.98 h59.06